# EAGLE board InkTime Schematic WK1 (EAGLE 9.7.0)
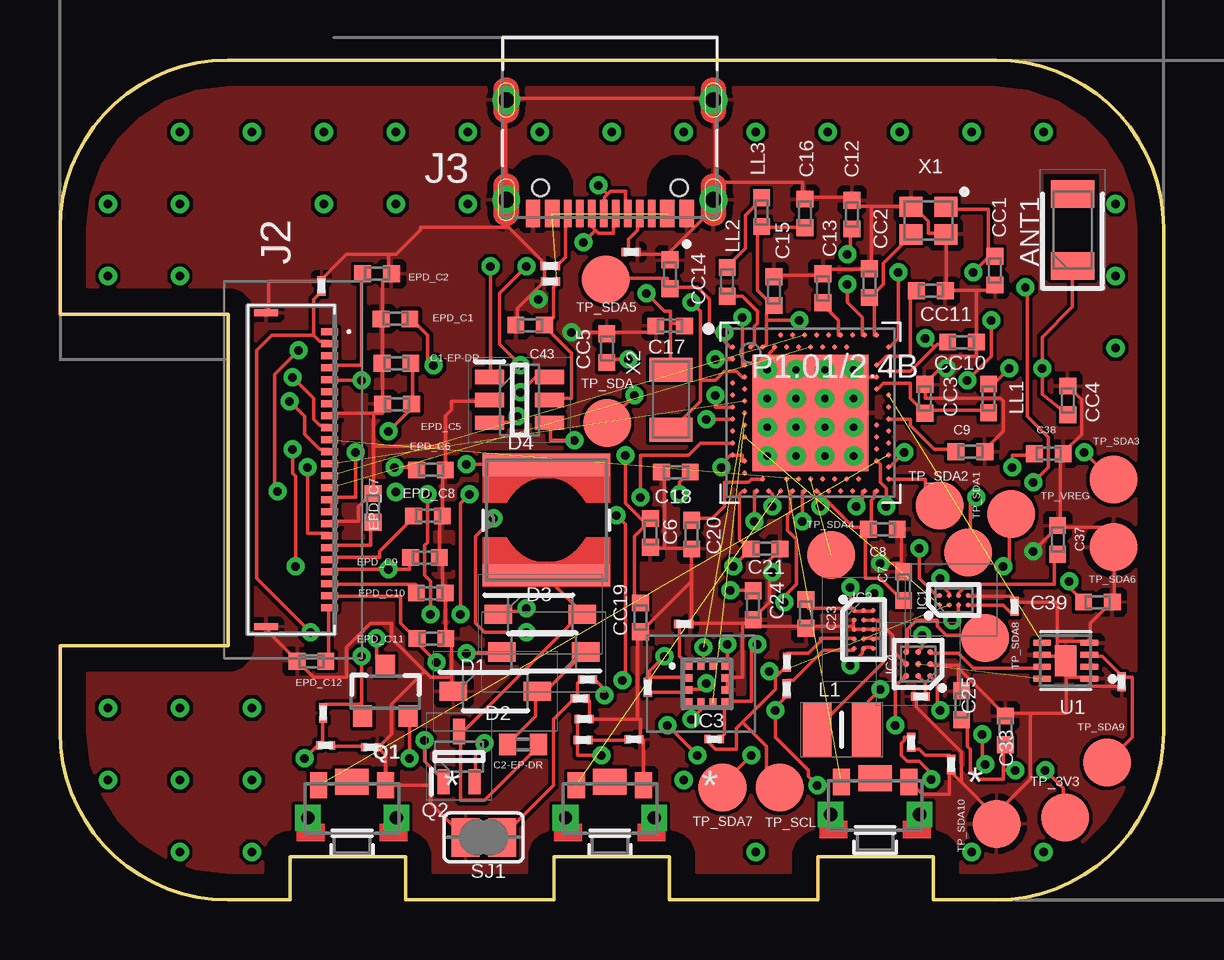
[diagram p0: board, top side]
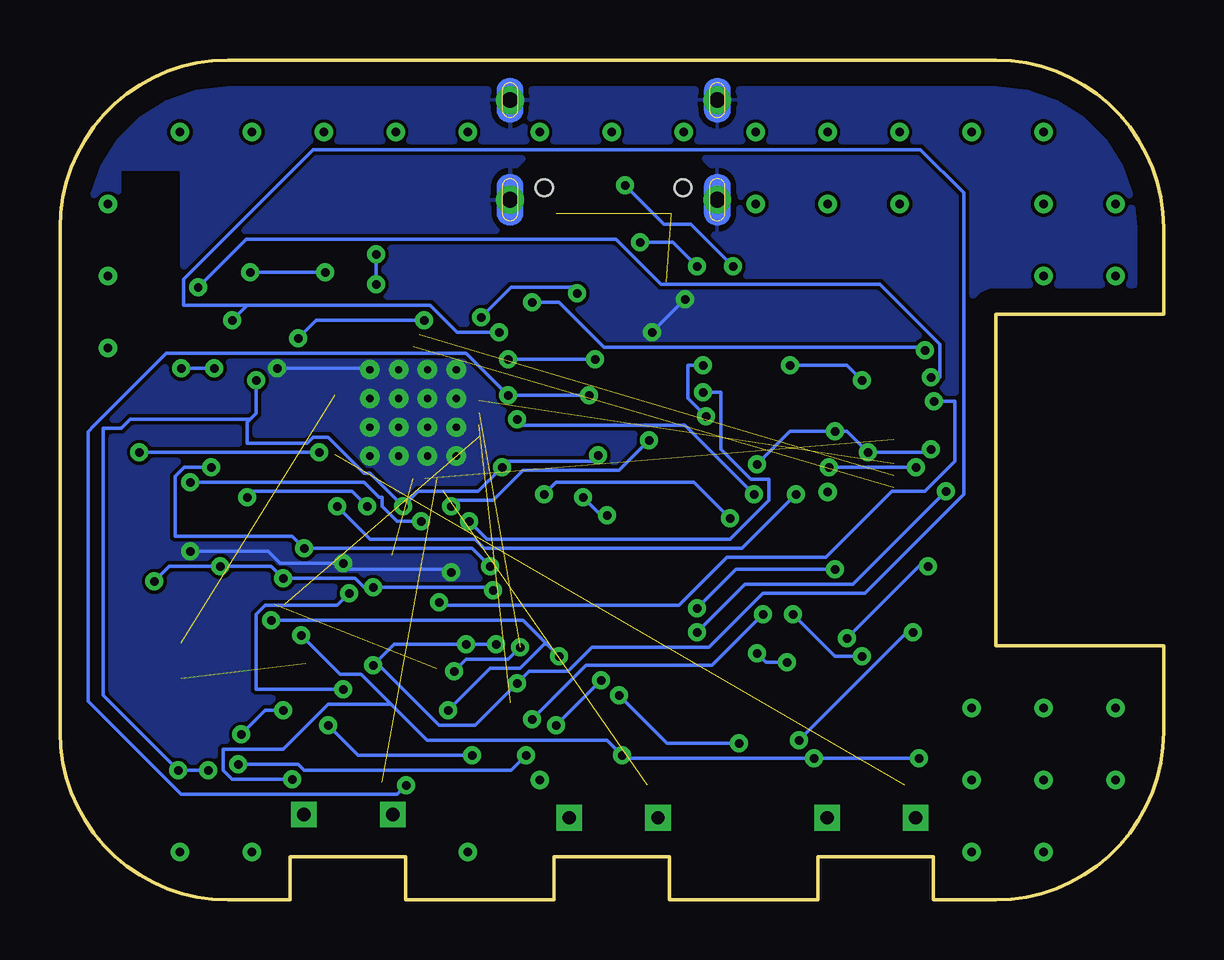
[diagram p1: board, bottom side, seen from below]

Size 46 x 35 mm. Coordinates in mm from the lower left corner, seen from the top.
Outline: 39,0 36.4,0 36.4,1.8 31.6,1.8 31.6,0 25.4,0 25.4,1.8 20.6,1.8 20.6,0 14.4,0 14.4,1.8 9.6,1.8 9.6,0 7,0 arc-90 0,7 0,10.6 7,10.6 7,24.4 0,24.4 0,28 arc-90 7,35 39,35 arc-90 46,28 46,7 arc-90 39,0
Copper layers (1*16): Top / Bottom
Stack-up Default Layer Stack: Top SilkScreen Epoxy Ink / Top SolderMask SR:Green 0.0254mm Dk 4.3 / Top Surface Finish Lead-Free 0.02mm / Top CuFoil:007 0.035mm / Dielectric-1 User Defined 1.5mm / Bottom CuFoil:007 0.035mm / Bottom Surface Finish Lead-Free 0.02mm / Bottom SolderMask SR:Green 0.0254mm Dk 4.3 / Bottom SilkScreen Epoxy Ink
Design rules: minimum copper width 6mil, minimum drill size 0.35mm, copper clearance wire_polygon to wire_polygon 6mil, copper clearance wire_polygon to pad_smd 6mil, copper clearance wire_polygon to via 6mil, copper clearance pad_smd to pad_smd 6mil, copper clearance pad_smd to via 6mil, copper clearance via to via 6mil, copper clearance smd to pad (same net) 6mil, copper clearance smd to via (same net) 6mil, copper clearance smd to smd (same net) 6mil, dimension clearance 40mil, via restrict clearance 0mil, restrict clearance 0mil, drill distance 6mil, keepout clearance 0mil
RestrictTop: area 41,25.8 to 43.3,30.3
RestrictBottom: area 41,25.8 to 43.4,30.4

## Footprints (pad centres in the part's own frame; a part is rotated, then mirrored left to right if it is on the bottom)
2450AT18B100E_ANTC3216X140N = smd 1.15 x 1.8: 1 -1.5,0; 2 1.5,0
NORDIC_NRF_3_RESC0402_M = smd 0.7 x 0.7: 1 -0.6,0; 2 0.6,0
GRM011R60J152KE01L_1_0201 = smd 0.35 x 0.25: 1 0,0.275; 2 0,-0.275
ESP32_C6_LIBRARY_1_ESP32_WROVER_EAGLE-LTSPICE_C0402 = smd 0.7 x 0.9: 1 -0.65,0; 2 0.65,0
ESP32_C6_LIBRARY_5_SOD3716X135N = smd 1.15 x 0.8: 1 -1.75,0; 2 1.75,0
ESP32_C6_LIBRARY_3_SOT95P280X145-6N = smd 1.2 x 0.6: 1 -1.25,0.95; 2 -1.25,0; 3 -1.25,-0.95; 4 1.25,-0.95; 5 1.25,0; 6 1.25,0.95
BQ25180YBGR_BGA8C40P2X4_100X155X50 = smd 0.2 x 0.2: A1 -0.2,0.6; A2 0.2,0.6; B1 -0.2,0.2; B2 0.2,0.2; C1 -0.2,-0.2; C2 0.2,-0.2; D1 -0.2,-0.6; D2 0.2,-0.6
RT6160AWSC_BGA15C40P3X5_140X230X60 = smd 0.216 x 0.216: A1 -0.4,0.8; A2 0,0.8; A3 0.4,0.8; B1 -0.4,0.4; B2 0,0.4; B3 0.4,0.4; C1 -0.4,0; C2 0,0; C3 0.4,0; D1 -0.4,-0.4; D2 0,-0.4; D3 0.4,-0.4; E1 -0.4,-0.8; E2 0,-0.8; E3 0.4,-0.8
BMA423_BMA423 = smd 0.3 x 0.35: 1 -0.75,-0.775; 2 -0.25,-0.775; 3 0.25,-0.775; 4 0.75,-0.775; 7 0.75,0.775; 8 0.25,0.775; 9 -0.25,0.775; 10 -0.75,0.775 | smd 0.35 x 0.3: 5 0.775,-0.25; 6 0.775,0.25; 11 -0.775,0.25; 12 -0.775,-0.25
DRV2605YZFR_BGA9C50P3X3_144X144X62 = smd 0.25 x 0.25: A1 -0.5,0.5; A2 0,0.5; A3 0.5,0.5; B1 -0.5,0; B2 0,0; B3 0.5,0; C1 -0.5,-0.5; C2 0,-0.5; C3 0.5,-0.5
503480-2400_5034802400 = smd 0.3 x 0.7: 1 -5.75,1.525; 2 -5.25,1.525; 3 -4.75,1.525; 4 -4.25,1.525; 5 -3.75,1.525; 6 -3.25,1.525; 7 -2.75,1.525; 8 -2.25,1.525; 9 -1.75,1.525; 10 -1.25,1.525; 11 -0.75,1.525; 12 -0.25,1.525; 13 0.25,1.525; 14 0.75,1.525; 15 1.25,1.525; 16 1.75,1.525; 17 2.25,1.525; 18 2.75,1.525; 19 3.25,1.525; 20 3.75,1.525; 21 4.25,1.525; 22 4.75,1.525; 23 5.25,1.525; 24 5.75,1.525 | smd 0.3 x 1: MP1 -6.54,-1.125; MP2 6.54,-1.125
KH-TYPE-C-16P_KINGHELM_KH-TYPE-C-16P = smd 0.6 x 1.15: A1_B12 -3.2,4.725; A4_B9 -2.4,4.725; A9_B4 2.4,4.725; A12_B1 3.2,4.725 | smd 0.3 x 1.15: A5 -1.25,4.725; A6 -0.25,4.725; A7 0.25,4.725; A8 1.25,4.725; B5 1.75,4.725; B6 0.75,4.725; B7 -0.75,4.725; B8 -1.75,4.725 | drill 0.65 pad 1.05: SH1 -4.32,0; SH2 4.32,0; SH3 -4.32,4.15; SH4 4.32,4.15 | hole 0.7: -2.89,3.65; 2.89,3.65
MLP2016SR47MT0S1_INDC2016X100N = smd 1.2 x 2.2: 1 -1.028,0; 2 1.028,0
ESP32_C6_LIBRARY_2_IND_4828-WE-TPC_WRE = smd 0.9 x 5.3: 1 -2.286,0; 2 2.286,0
NORDIC_NRF_2_RESC0402_M = smd 0.7 x 0.7: 1 -0.6,0; 2 0.6,0
NORDIC_NRF_4_AQFN50P700X700X85_HS-74N = smd 4.85 x 4.85: P$74 0,0 | drill 0.3 pad 0.6: P$75 -1.8,1.8; P$76 -0.6,1.8; P$77 0.6,1.8; P$78 1.8,1.8; P$79 -1.8,0.6; P$80 -0.6,0.6; P$81 0.6,0.6; P$82 1.8,0.6; P$83 -1.8,-0.6; P$84 -0.6,-0.6; P$85 0.6,-0.6; P$86 1.8,-0.6; P$87 -1.8,-1.8; P$88 -0.6,-1.8; P$89 0.6,-1.8; P$90 1.8,-1.8 | smd 0.2 x 0.2: P$A8 -1.25,3.25; P$A10 -0.75,3.25; P$A12 -0.25,3.25; P$A14 0.25,3.25; P$A16 0.75,3.25; P$A18 1.25,3.25; P$A20 1.75,3.25; P$A22 2.25,3.25; P$A23 2.75,3.25; P$AA24 3.25,-2.25; P$AB2 -2.75,-2.5; P$AC5 -2,-2.75; P$AC9 -1,-2.75; P$AC11 -0.5,-2.75; P$AC13 0,-2.75; P$AC15 0.5,-2.75; P$AC17 1,-2.75; P$AC19 1.5,-2.75; P$AC21 2,-2.75; P$AC24 3.25,-2.75; P$AD2 -2.75,-3.25; P$AD4 -2.25,-3.25; P$AD6 -1.75,-3.25; P$AD8 -1.25,-3.25; P$AD10 -0.75,-3.25; P$AD12 -0.25,-3.25; P$AD14 0.25,-3.25; P$AD16 0.75,-3.25; P$AD18 1.25,-3.25; P$AD20 1.75,-3.25; P$AD22 2.25,-3.25; P$AD23 2.75,-3.25; P$B1 -3.25,2.75; P$B3 -2.5,2.75; P$B5 -2,2.75; P$B7 -1.5,2.75; P$B9 -1,2.75; P$B11 -0.5,2.75; P$B13 0,2.75; P$B15 0.5,2.75; P$B17 1,2.75; P$B19 1.5,2.75; P$B24 3.25,2.75; P$C1 -3.25,2.25; P$D2 -2.75,2; P$D23 2.75,2; P$E24 3.25,1.75; P$F2 -2.75,1.5; P$F23 2.75,1.5; P$G1 -3.25,1.25; P$H2 -2.75,1; P$H23 2.75,1; P$J1 -3.25,0.75; P$J24 3.25,0.75; P$K2 -2.75,0.5; P$L1 -3.25,0.25; P$L24 3.25,0.25; P$M2 -2.75,0; P$N1 -3.25,-0.25; P$N24 3.25,-0.25; P$P2 -2.75,-0.5; P$P23 2.75,-0.5; P$R1 -3.25,-0.75; P$R24 3.25,-0.75; P$T2 -2.75,-1; P$T23 2.75,-1; P$U1 -3.25,-1.25; P$U24 3.25,-1.25; P$V23 2.75,-1.5; P$W1 -3.25,-1.75; P$W24 3.25,-1.75; P$Y2 -2.75,-2; P$Y23 2.75,-2
ESP32_C6_LIBRARY_4_ESP32_C6_LIBRARY_4_ESP32_C6_LIBRARY_4_ESP32_C6_LIBRARY_4_ESP32_WROVER_SPARKFUN-DISCRETESEMI_SOT23-3 = smd 0.8 x 0.9: 1 -0.95,-1; 2 0.95,-1; 3 0,1.1
ESP32_C6_LIBRARY_6_SOT65P210X110-3N = smd 1.05 x 0.5: 1 -1.05,0.65; 2 -1.05,-0.65; 3 1.05,0
CPF0201D7K68C1_0201 = smd 0.35 x 0.25: 1 0,0.275; 2 0,-0.275
ESP32_C6_LIBRARY_7_JUMPER_SJ = smd 1.168 x 1.6: 1 -0.762,0; 2 0.762,0
2025-10-22_07-23-44_LIBRARY_SW_EVP-AKE31A_PAN = smd 0.711 x 1.092: 1 -1.4,-0.972; 2 1.4,-0.972 | drill 0.559 pad 0.914 square: 3 -1.848,0.381; 4 1.848,0.381 | smd 1.397 x 1.092: 5 0,-1.124
HECTOR_WATCH_1_TP20R = smd 2 x 2: TP 0,0
ESP32_C6_LIBRARY_SON50P200X200X80-9N = smd 0.76 x 0.27: 1 -0.985,0.75; 2 -0.985,0.25; 3 -0.985,-0.25; 4 -0.985,-0.75; 5 0.985,-0.75; 6 0.985,-0.25; 7 0.985,0.25; 8 0.985,0.75 | smd 0.9 x 1.3: 9 0,0
NORDIC_NRF_BT-XTAL_2016_N = smd 0.95 x 0.85: 1 -0.725,-0.575; 2 0.725,-0.575; 3 0.725,0.575; 4 -0.725,0.575
NORDIC_NRF_1_XTAL_3215_N = smd 1 x 1.8: 1 -1.25,0; 2 1.25,0

## Placement (x,y rotation side)
ANT1  2450AT18B100E_2450AT18B100E  [2450AT18B100E_ANTC3216X140N]  42.21,27.92 90 top
C1-EP-DR  10uF  [NORDIC_NRF_3_RESC0402_M]  14.03,22.36 180 top
C2  GRM011R60J152KE01L_1_GRM011R60J152KE01L  [GRM011R60J152KE01L_1_0201]  44.24,9.09 180 top
C2-EP-DR  4.7uF/25V  [ESP32_C6_LIBRARY_1_ESP32_WROVER_EAGLE-LTSPICE_C0402]  19.3,6.48 0 top
C3  1uF  [GRM011R60J152KE01L_1_0201]  35.87,8.48 90 top
C4  0.1uF  [GRM011R60J152KE01L_1_0201]  21.85,7.54 270 top
C5  GRM011R60J152KE01L_1_GRM011R60J152KE01L  [GRM011R60J152KE01L_1_0201]  12.96,6.36 270 top
C6  4.7uF  [NORDIC_NRF_3_RESC0402_M]  24.61,15.29 90 top
C7  100nF  [NORDIC_NRF_3_RESC0402_M]  35.17,13.08 90 top
C8  100nF  [NORDIC_NRF_3_RESC0402_M]  34.3,15.45 0 top
C9  820pF  [NORDIC_NRF_3_RESC0402_M]  37.95,18.68 0 top
C10  GRM011R60J152KE01L_1_GRM011R60J152KE01L  [GRM011R60J152KE01L_1_0201]  23.92,6.69 270 top
C11  GRM011R60J152KE01L_1_GRM011R60J152KE01L  [GRM011R60J152KE01L_1_0201]  37.15,5.64 180 top
C12  100pF  [NORDIC_NRF_3_RESC0402_M]  33.01,28.56 90 top
C13  N.C  [NORDIC_NRF_3_RESC0402_M]  31.8,25.49 90 top
C15  1uF  [NORDIC_NRF_3_RESC0402_M]  29.76,25.37 90 top
C16  47nF  [NORDIC_NRF_3_RESC0402_M]  31.05,28.61 90 top
C17  12pF  [NORDIC_NRF_3_RESC0402_M]  25.44,23.92 180 top
C18  12pF  [NORDIC_NRF_3_RESC0402_M]  25.67,17.83 180 top
C20  4.7uF  [NORDIC_NRF_3_RESC0402_M]  26.33,15.22 90 top
C21  4.7uF  [NORDIC_NRF_3_RESC0402_M]  29.41,14.63 0 top
C23  0.1uF  [NORDIC_NRF_3_RESC0402_M]  31.09,11.92 90 top
C24  10uF  [NORDIC_NRF_3_RESC0402_M]  28.89,12.28 90 top
C25  22uF  [NORDIC_NRF_3_RESC0402_M]  37.58,8.11 90 top
C33  22uF  [NORDIC_NRF_3_RESC0402_M]  39.4,7.07 90 top
C37  1uF  [NORDIC_NRF_3_RESC0402_M]  41.58,15 90 top
C38  1uF  [NORDIC_NRF_3_RESC0402_M]  41.21,18.59 0 top
C39  10uF  [NORDIC_NRF_3_RESC0402_M]  43.26,12.41 0 top
C42  GRM011R60J152KE01L_1_GRM011R60J152KE01L  [GRM011R60J152KE01L_1_0201]  20.45,25.77 90 top
C43  4.7uF  [NORDIC_NRF_3_RESC0402_M]  19.6,23.96 180 top
CC1  12pF  [NORDIC_NRF_3_RESC0402_M]  38.97,26.23 270 top
CC2  12pF  [NORDIC_NRF_3_RESC0402_M]  33.74,25.7 90 top
CC3  1pF  [NORDIC_NRF_3_RESC0402_M]  36.05,20.89 270 top
CC4  1pF  [NORDIC_NRF_3_RESC0402_M]  42.01,20.82 270 top
CC5  100nF  [NORDIC_NRF_3_RESC0402_M]  22.8,23 270 top
CC10  N.C  [NORDIC_NRF_3_RESC0402_M]  37.6,23.25 0 top
CC11  100pF  [NORDIC_NRF_3_RESC0402_M]  36.3,25.38 0 top
CC14  4.7uF  [NORDIC_NRF_3_RESC0402_M]  25.43,26.07 270 top
CC19  100nF  [NORDIC_NRF_3_RESC0402_M]  24.2,11.78 270 top
D1  ESP32_C6_LIBRARY_5_MBR0530  [ESP32_C6_LIBRARY_5_SOD3716X135N]  20.17,10.33 180 top
D2  ESP32_C6_LIBRARY_5_MBR0530  [ESP32_C6_LIBRARY_5_SOD3716X135N]  18.15,8.69 0 top
D3  ESP32_C6_LIBRARY_5_MBR0530  [ESP32_C6_LIBRARY_5_SOD3716X135N]  20.03,11.9 0 top
D4  ESP32_C6_LIBRARY_3_USBLC6-2SC6Y  [ESP32_C6_LIBRARY_3_SOT95P280X145-6N]  19.16,20.83 0 top
EPD_C1  1uF/50V  [NORDIC_NRF_3_RESC0402_M]  13.99,24.21 0 top
EPD_C2  1uF/50V  [NORDIC_NRF_3_RESC0402_M]  13.22,26.09 180 top
EPD_C5  0.1uF/50V  [NORDIC_NRF_3_RESC0402_M]  14.05,20.66 0 top
EPD_C6  1uF/50V  [NORDIC_NRF_3_RESC0402_M]  15.46,17.92 180 top
EPD_C7  1uF/50V  [NORDIC_NRF_3_RESC0402_M]  13.05,16.34 270 top
EPD_C8  1uF/50V  [NORDIC_NRF_3_RESC0402_M]  15.34,16 180 top
EPD_C9  1uF/50V  [NORDIC_NRF_3_RESC0402_M]  15.21,14.27 180 top
EPD_C10  1uF/50V  [NORDIC_NRF_3_RESC0402_M]  15.46,12.79 180 top
EPD_C11  1uF/50V  [NORDIC_NRF_3_RESC0402_M]  15.48,10.89 180 top
EPD_C12  1uF/50V  [NORDIC_NRF_3_RESC0402_M]  10.49,9.95 0 top
IC1  BQ25180YBGR_BQ25180YBGR  [BQ25180YBGR_BGA8C40P2X4_100X155X50]  37.26,12.5 90 top
IC2  RT6160AWSC_RT6160AWSC  [RT6160AWSC_BGA15C40P3X5_140X230X60]  33.5,11.27 0 top
IC3  BMA423_BMA423  [BMA423_BMA423]  26.97,9 270 top
IC4  DRV2605YZFR_DRV2605YZFR  [DRV2605YZFR_BGA9C50P3X3_144X144X62]  35.77,9.83 180 top
J2  503480-2400_503480-2400  [503480-2400_5034802400]  9.72,17.93 270 top
J3  KH-TYPE-C-16P_KH-TYPE-C-16P  [KH-TYPE-C-16P_KINGHELM_KH-TYPE-C-16P]  22.92,33.33 180 top
L1  MLP2016SR47MT0S1_FTC252012SR47MBCA  [MLP2016SR47MT0S1_INDC2016X100N]  32.59,7.09 180 top
L2  ESP32_C6_LIBRARY_2_744043680IND_4828-WE-TPC_WRE  [ESP32_C6_LIBRARY_2_IND_4828-WE-TPC_WRE]  20.27,15.83 90 top
LL1  3.9nH  [NORDIC_NRF_2_RESC0402_M]  38.71,20.9 90 top
LL2  10uH  [NORDIC_NRF_2_RESC0402_M]  27.81,25.75 270 top
LL3  15uH  [NORDIC_NRF_2_RESC0402_M]  29.25,28.67 90 top
P1.01/2.4B  NORDIC_NRF_4_NRF52840_QF  [NORDIC_NRF_4_AQFN50P700X700X85_HS-74N]  31.28,20.3 0 top
Q1  20V/4.2A/52mΩ/1.4W  [ESP32_C6_LIBRARY_4_ESP32_C6_LIBRARY_4_ESP32_C6_LIBRARY_4_ESP32_C6_LIBRARY_4_ESP32_WROVER_SPARKFUN-DISCRETESEMI_SOT23-3]  13.57,8.66 0 top
Q2  ESP32_C6_LIBRARY_6_SI1308EDL-T1-GE3  [ESP32_C6_LIBRARY_6_SOT65P210X110-3N]  16.64,5.97 90 top
R1  10K  [CPF0201D7K68C1_0201]  39.8,12.24 0 top
R2  CPF0201D7K68C1_CPF0201D7K68C1  [CPF0201D7K68C1_0201]  30.3,9.91 180 top
R3  CPF0201D7K68C1_CPF0201D7K68C1  [CPF0201D7K68C1_0201]  30.29,8.8 180 top
R4  CPF0201D7K68C1_CPF0201D7K68C1  [CPF0201D7K68C1_0201]  27.27,6.7 90 top
R5  CPF0201D7K68C1_CPF0201D7K68C1  [CPF0201D7K68C1_0201]  24.5,8.86 0 top
R6  CPF0201D7K68C1_CPF0201D7K68C1  [CPF0201D7K68C1_0201]  10.89,25.58 0 top
R7  CPF0201D7K68C1_CPF0201D7K68C1  [CPF0201D7K68C1_0201]  10.97,7.79 0 top
R8  CPF0201D7K68C1_CPF0201D7K68C1  [CPF0201D7K68C1_0201]  26,11.5 90 top
R9  CPF0201D7K68C1_CPF0201D7K68C1  [CPF0201D7K68C1_0201]  21.99,9.18 90 top
R10  CPF0201D7K68C1_CPF0201D7K68C1  [CPF0201D7K68C1_0201]  21.68,8.4 270 top
R11  CPF0201D7K68C1_CPF0201D7K68C1  [CPF0201D7K68C1_0201]  11.07,6.45 270 top
R12  CPF0201D7K68C1_CPF0201D7K68C1  [CPF0201D7K68C1_0201]  21.81,6.67 270 top
R13  CPF0201D7K68C1_CPF0201D7K68C1  [CPF0201D7K68C1_0201]  35.47,6.57 180 top
R14  CPF0201D7K68C1_CPF0201D7K68C1  [CPF0201D7K68C1_0201]  23.8,27.01 90 top
R15  CPF0201D7K68C1_CPF0201D7K68C1  [CPF0201D7K68C1_0201]  20.44,26.41 90 top
SJ1  0  [ESP32_C6_LIBRARY_7_JUMPER_SJ]  17.66,2.61 0 top
SW1  2025-10-22_07-23-44_LIBRARY_EVP-AKE31ASW_EVP-AKE31A_PAN  [2025-10-22_07-23-44_LIBRARY_SW_EVP-AKE31A_PAN]  22.92,3.81 180 top
SW2  2025-10-22_07-23-44_LIBRARY_EVP-AKE31ASW_EVP-AKE31A_PAN  [2025-10-22_07-23-44_LIBRARY_SW_EVP-AKE31A_PAN]  33.98,3.94 180 top
SW3  2025-10-22_07-23-44_LIBRARY_EVP-AKE31ASW_EVP-AKE31A_PAN  [2025-10-22_07-23-44_LIBRARY_SW_EVP-AKE31A_PAN]  12.17,3.81 180 top
TP_3V3  HECTOR_WATCH_1_TPTP20R  [HECTOR_WATCH_1_TP20R]  41.89,3.43 0 top
TP_SCL  HECTOR_WATCH_1_TPTP20R  [HECTOR_WATCH_1_TP20R]  30.01,4.69 0 top
TP_SDA  HECTOR_WATCH_1_TPTP20R  [HECTOR_WATCH_1_TP20R]  22.8,19.87 0 top
TP_SDA1  HECTOR_WATCH_1_TPTP20R  [HECTOR_WATCH_1_TP20R]  37.86,14.48 0 top
TP_SDA2  HECTOR_WATCH_1_TPTP20R  [HECTOR_WATCH_1_TP20R]  36.67,16.44 0 top
TP_SDA3  HECTOR_WATCH_1_TPTP20R  [HECTOR_WATCH_1_TP20R]  43.91,17.52 0 top
TP_SDA4  HECTOR_WATCH_1_TPTP20R  [HECTOR_WATCH_1_TP20R]  32.15,14.37 0 top
TP_SDA5  HECTOR_WATCH_1_TPTP20R  [HECTOR_WATCH_1_TP20R]  22.74,25.86 0 top
TP_SDA6  HECTOR_WATCH_1_TPTP20R  [HECTOR_WATCH_1_TP20R]  43.91,14.7 0 top
TP_SDA7  HECTOR_WATCH_1_TPTP20R  [HECTOR_WATCH_1_TP20R]  27.62,4.68 0 top
TP_SDA8  HECTOR_WATCH_1_TPTP20R  [HECTOR_WATCH_1_TP20R]  38.55,10.92 0 top
TP_SDA9  HECTOR_WATCH_1_TPTP20R  [HECTOR_WATCH_1_TP20R]  43.64,5.73 0 top
TP_SDA10  HECTOR_WATCH_1_TPTP20R  [HECTOR_WATCH_1_TP20R]  39.05,3.17 0 top
TP_VREG  HECTOR_WATCH_1_TPTP20R  [HECTOR_WATCH_1_TP20R]  39.65,16.09 0 top
U1  ESP32_C6_LIBRARY_MAX17048G+T10  [ESP32_C6_LIBRARY_SON50P200X200X80-9N]  41.92,9.97 180 top
X1  32MHz  [NORDIC_NRF_BT-XTAL_2016_N]  36.2,28.31 180 top
X2  32.768KHz  [NORDIC_NRF_1_XTAL_3215_N]  25.46,20.85 90 top

## Library data of the parts
ANT1 = InkTime_v5; ARROW_PART_NUMBER: 2450AT18B100E; ARROW_PRICE-STOCK: https://www.arrow.com/en/products/2450at18b100e/johanson-dielectrics?utm_currency=USD&region=nac; DESCRIPTION: Antennas 2.45GHz ANTENNA; HEIGHT: 1.4mm; MANUFACTURER_NAME: JOHANSON TECHNOLOGY; MANUFACTURER_PART_NUMBER: 2450AT18B100E; MOUSER_PART_NUMBER: 609-2450AT18B100E; MOUSER_PRICE-STOCK: https://www.mouser.co.uk/ProductDetail/Johanson-Technology/2450AT18B100E?qs=yCnrNFeXz%252Bh5MFsFIXGZGA%3D%3D
C1-EP-DR C2-C13 C15-C18 C20 C21 C23-C25 C33 C37-C39 C42 C43 CC1-CC5 CC10 CC11 CC14 CC19 EPD_C1 EPD_C2 EPD_C5-EPD_C12 LL1-LL3 R1-R15 SJ1 TP_3V3 TP_SCL TP_SDA TP_SDA1-TP_SDA10 TP_VREG X1 X2 = InkTime_v5
C2-EP-DR = InkTime_v5; SPICEMODEL: NONE; SPICEPREFIX: C
D1-D3 = InkTime_v5; AVAILABILITY: In Stock; CHECK_PRICES: https://www.snapeda.com/parts/MBR0530/Onsemi/view-part/?ref=eda; DESCRIPTION: Diode Schottky 30 V 500mA Surface Mount SOD-123; MF: ON Semiconductor; MP: MBR0530; PACKAGE: SOD-123-2 ON Semiconductor; PRICE: None; PURCHASE-URL: https://www.snapeda.com/api/url_track_click_mouser/?unipart_id=179458&manufacturer=ON Semiconductor&part_name=MBR0530&search_term=None; SNAPEDA_LINK: https://www.snapeda.com/parts/MBR0530/Onsemi/view-part/?ref=snap
D4 = InkTime_v5; AVAILABILITY: In Stock; CHECK_PRICES: https://www.snapeda.com/parts/USBLC6-2SC6Y/STMicroelectronics/view-part/?ref=eda; DESCRIPTION: 17V Clamp 5A (8/20µs) Ipp Tvs Diode Surface Mount SOT-23-6; MF: STMicroelectronics; MP: USBLC6-2SC6Y; PACKAGE: SOT-23-6 STMicroelectronics; PRICE: None; SNAPEDA_LINK: https://www.snapeda.com/parts/USBLC6-2SC6Y/STMicroelectronics/view-part/?ref=snap
IC1 = InkTime_v5; ARROW_PART_NUMBER: BQ25180YBGR; ARROW_PRICE-STOCK: https://www.arrow.com/en/products/bq25180ybgr/texas-instruments?utm_currency=USD&region=nac; DESCRIPTION: Charger IC Lithium Ion/Polymer, Lithium Iron Phosphate 8-DSBGA (1.6x1.1); HEIGHT: 0.5mm; MANUFACTURER_NAME: Texas Instruments; MANUFACTURER_PART_NUMBER: BQ25180YBGR; MOUSER_PART_NUMBER: 595-BQ25180YBGR; MOUSER_PRICE-STOCK: https://www.mouser.co.uk/ProductDetail/Texas-Instruments/BQ25180YBGR?qs=doiCPypUmgEWjAK%252BJAX6Tw%3D%3D
IC2 = InkTime_v5; DESCRIPTION: Buck-Boost Regulator Positive Output Step-Up/Step-Down I2C DC-DC Controller IC 15-WL-CSP (BSC) (1.4x2.3); HEIGHT: 0.6mm; MANUFACTURER_NAME: RICHTEK; MANUFACTURER_PART_NUMBER: RT6160AWSC; MOUSER_PART_NUMBER: 835-RT6160AWSC; MOUSER_PRICE-STOCK: https://www.mouser.co.uk/ProductDetail/Richtek/RT6160AWSC?qs=amGC7iS6iy%2FLd9PSoixZXQ%3D%3D
IC3 = InkTime_v5; ARROW_PART_NUMBER: BMA423; ARROW_PRICE-STOCK: https://www.arrow.com/en/products/bma423/bosch; DESCRIPTION: Accelerometers Triaxial low-g 12bit Acceleration Sensor; HEIGHT: 1mm; MANUFACTURER_NAME: BOSCH; MANUFACTURER_PART_NUMBER: BMA423; MOUSER_PART_NUMBER: 262-BMA423; MOUSER_PRICE-STOCK: https://www.mouser.co.uk/ProductDetail/Bosch-Sensortec/BMA423?qs=HXFqYaX1Q2xC%252BSgeGoX3mg%3D%3D
IC4 = InkTime_v5; ARROW_PART_NUMBER: DRV2605YZFR; ARROW_PRICE-STOCK: https://www.arrow.com/en/products/drv2605yzfr/texas-instruments?region=nac; DESCRIPTION: Haptic Driver for ERM/LRA with Built-In Library and Smart Loop Architecture; HEIGHT: 0.625mm; MANUFACTURER_NAME: Texas Instruments; MANUFACTURER_PART_NUMBER: DRV2605YZFR
J2 = InkTime_v5; DESCRIPTION: FFC & FPC Connectors 0.5mm FPC RA SMT Dual Contact 24Ckt; HEIGHT: 1.87mm; MANUFACTURER_NAME: Molex; MANUFACTURER_PART_NUMBER: 503480-2400; MOUSER_PART_NUMBER: 538-503480-2400; MOUSER_PRICE-STOCK: https://www.mouser.co.uk/ProductDetail/Molex/503480-2400?qs=OAhjpuo3Vu7efIoxFh9AOw%3D%3D
J3 = InkTime_v5; AVAILABILITY: Not in stock; CHECK_PRICES: https://www.snapeda.com/parts/KH-TYPE-C-16P/Kinghelm/view-part/?ref=eda; MF: kinghelm; MP: KH-TYPE-C-16P; PACKAGE: None; PRICE: None; SNAPEDA_LINK: https://www.snapeda.com/parts/KH-TYPE-C-16P/Kinghelm/view-part/?ref=snap
L1 = InkTime_v5; DESCRIPTION: SMD / SMT Inductors (Coils), L=0.47?H, L x W x T :; HEIGHT: 1mm; JLCPCB: https://jlcpcb.com/partdetail/6763488-FTC252012SR47MBCA/C5832368; MANUFACTURER_NAME: TDK; MANUFACTURER_PART_NUMBER: FTC252012SR47MBCA
L2 = InkTime_v5; COPYRIGHT: Copyright (C) 2024 Ultra Librarian. All rights reserved.; MANUFACTURER_PART_NUMBER: 744043680; MFR_NAME: Wurth Electronics
P1.01/2.4B = InkTime_v5; BGA: (LAYERS (-1 3V3/2.4A))
Q1 = InkTime_v5; PROD_ID: TRAN-14388
Q2 = InkTime_v5; AVAILABILITY: In Stock; CHECK_PRICES: https://www.snapeda.com/parts/SI1308EDL-T1-GE3/Vishay+Siliconix/view-part/?ref=eda; DESCRIPTION: Si1308EDL-T1-GE3 N-channel MOSFET Transistor, 1.5 A, 30 V, 3-Pin SC-70 | Siliconix / Vishay SI1308EDL-T1-GE3; MF: Vishay Siliconix; MP: SI1308EDL-T1-GE3; PACKAGE: SOT-323 Vishay Semiconductor; PRICE: None; PURCHASE-URL: https://www.snapeda.com/api/url_track_click_mouser/?unipart_id=274603&manufacturer=Vishay Siliconix&part_name=SI1308EDL-T1-GE3&search_term=None; SNAPEDA_LINK: https://www.snapeda.com/parts/SI1308EDL-T1-GE3/Vishay+Siliconix/view-part/?ref=snap
SW1-SW3 = InkTime_v5; COPYRIGHT: Copyright (C) 2025 Ultra Librarian. All rights reserved.; DIGI-KEY_PART_NUMBER_1: P123437TR-ND; DIGI-KEY_PART_NUMBER_2: P123437CT-ND; DIGI-KEY_PART_NUMBER_3: P123437DKR-ND; MANUFACTURER_NAME: Panasonic; MANUFACTURER_PART_NUMBER: EVP-AKE31A
U1 = InkTime_v5; AVAILABILITY: In Stock; CHECK_PRICES: https://www.snapeda.com/parts/MAX17048G+T10/Analog+Devices/view-part/?ref=eda; DESCRIPTION: 3µA 1-Cell/2-Cell Fuel Gauge with ModelGauge; MF: Analog Devices; MP: MAX17048G+T10; PACKAGE: TDFN-8 Maxim; PRICE: None; PURCHASE-URL: https://www.snapeda.com/api/url_track_click_mouser/?unipart_id=329239&manufacturer=Analog Devices&part_name=MAX17048G+T10&search_term=None; SNAPEDA_LINK: https://www.snapeda.com/parts/MAX17048G+T10/Analog+Devices/view-part/?ref=snap

## Nets
3V3/1.7D: C4.2 IC4.C2 Q1.2 R7.2 R11.2 R12.2 R13.2
3V3/2.4A: C6.2 C7.1 C8.1 C25.1 C33.1 CC14.2 CC19.1 IC2.E2 IC2.E3 IC3.3 IC3.7 IC3.10 P1.01/2.4B.P$AD14 P1.01/2.4B.P$AD23 P1.01/2.4B.P$B1 P1.01/2.4B.P$W1 P1.01/2.4B.P$Y2 R4.2 R5.2 TP_3V3.TP TP_SDA5.TP
ALERT: P1.01/2.4B.P$J24 U1.5
D+: D4.4 P1.01/2.4B.P$AD6
D-: D4.6 P1.01/2.4B.P$AD4
DN: D4.1 J3.A7 J3.B7
DP: D4.3 J3.A6 J3.B6
EPD_3V3: C1-EP-DR.1 EPD_C5.2 J2.15 J2.16 L2.2 Q1.3
EPD_BUSY: J2.9 P1.01/2.4B.P$AD12
EPD_CS: J2.12 P1.01/2.4B.P$K2
EPD_DC: J2.11 P1.01/2.4B.P$AD10
EPD_RST: J2.10 P1.01/2.4B.P$AC11
GDR: J2.2 Q2.1 R6.2
GND: C1-EP-DR.2 C2.1 C3.1 C4.1 C5.1 C6.1 C7.2 C8.2 C9.2 C10.1 C11.1 C12.2 C13.2 C15.2 C16.2 C17.2 C18.2 C20.1 C21.2 C23.1 C24.1 C25.2 C33.2 C37.2 C38.2 C39.2 C42.1 C43.2 CC1.2 CC2.2 CC3.1 CC4.1 CC5.1 CC10.2 CC11.2 CC14.1 CC19.2 D2.1 D4.2 EPD_C1.1 EPD_C2.1 EPD_C5.1 EPD_C6.1 EPD_C7.1 EPD_C8.1 EPD_C9.1 EPD_C10.1 EPD_C11.1 EPD_C12.1 IC1.D2 IC2.B1 IC2.C1 IC2.C2 IC2.C3 IC3.8 IC3.9 IC4.B1 IC4.B3 J2.8 J2.17 J2.MP1 J2.MP2 J3.A1_B12 J3.A12_B1 J3.SH1 J3.SH2 J3.SH3 J3.SH4 P1.01/2.4B.P$74 P1.01/2.4B.P$75 P1.01/2.4B.P$76 P1.01/2.4B.P$77 P1.01/2.4B.P$78 P1.01/2.4B.P$79 P1.01/2.4B.P$80 P1.01/2.4B.P$81 P1.01/2.4B.P$82 P1.01/2.4B.P$83 P1.01/2.4B.P$84 P1.01/2.4B.P$85 P1.01/2.4B.P$86 P1.01/2.4B.P$87 P1.01/2.4B.P$88 P1.01/2.4B.P$89 P1.01/2.4B.P$90 P1.01/2.4B.P$B7 P1.01/2.4B.P$F23 R1.1 R6.1 R8.2 R10.1 R14.2 R15.1 SJ1.1 SW1.1 SW2.1 SW3.1 TP_SDA6.TP TP_SDA10.TP U1.1 U1.4 U1.6 U1.9 X1.2 X1.4
HAPTIC_EN: IC4.A1 P1.01/2.4B.P$U1
IMU_INT1: IC3.5 P1.01/2.4B.P$N1
IMU_INT2: IC3.6 P1.01/2.4B.P$P2
LX1: IC2.B2 IC2.B3 L1.1
LX2: IC2.D2 IC2.D3 L1.2
MOSI: J2.14 P1.01/2.4B.P$B13
N$1: IC1.D1 R1.2
N$2: C9.1 P1.01/2.4B.P$N24
N$3: CC3.2 LL1.1 P1.01/2.4B.P$H23
N$4: IC2.D1 R2.2
N$5: IC2.E1 R3.2
N$6: C20.2 P1.01/2.4B.P$AC5
N$7: ANT1.1 CC4.2 LL1.2
N$8: CC1.1 P1.01/2.4B.P$B24 X1.1
N$9: CC2.1 P1.01/2.4B.P$A23 X1.3
N$10: CC11.1 P1.01/2.4B.P$D23
N$11: C18.1 P1.01/2.4B.P$F2 X2.1
N$12: C12.1 P1.01/2.4B.P$A22
N$13: C13.1 P1.01/2.4B.P$A18
N$14: LL2.1 LL3.2
N$15: LL2.2 P1.01/2.4B.P$B3
N$17: C15.1 C16.1 CC10.1 LL3.1 P1.01/2.4B.P$B5 P1.01/2.4B.P$E24
N$18: C17.1 P1.01/2.4B.P$D2 X2.2
N$19: IC3.1 R8.1
N$20: CC5.2 P1.01/2.4B.P$C1
N$21: C2-EP-DR.1 D1.1 D2.2
N$22: Q2.2 R9.2
N$23: R9.1 R10.2 SJ1.2
N$24: C2-EP-DR.2 D3.2 L2.1 Q2.3
N$25: EPD_C2.2 J2.4
N$26: EPD_C1.2 J2.5
N$27: J3.B5 R15.2
N$28: EPD_C7.2 J2.19
N$29: C5.2 R11.1
N$30: EPD_C12.2 J2.24
N$31: EPD_C6.2 J2.18
N$32: EPD_C8.2 J2.20
N$33: C10.2 R12.1
N$34: EPD_C10.2 J2.22
N$35: C11.2 R13.1
N$36: J3.A5 R14.1
N$37: C3.2 IC4.A2
OUT+: IC4.A3 TP_SDA7.TP
OUT-: IC4.C3 TP_SDA8.TP
P0.04: P1.01/2.4B.P$J1
P0.09: P1.01/2.4B.P$L24
P0.13: P1.01/2.4B.P$AD8 SW1.2
P0.14: P1.01/2.4B.P$AC9 SW2.2
P0.19: P1.01/2.4B.P$AC15
P0.20: P1.01/2.4B.P$AD16
P0.21: P1.01/2.4B.P$AC17
P0.22: P1.01/2.4B.P$AD18
P0.23: P1.01/2.4B.P$AC19
P0.24: P1.01/2.4B.P$AD20
P0.25: P1.01/2.4B.P$AC21
P0.26: P1.01/2.4B.P$G1
P0.27: P1.01/2.4B.P$H2
P0.28: P1.01/2.4B.P$B11
P0.29: P1.01/2.4B.P$A10
P0.30: P1.01/2.4B.P$B9
P0.31: P1.01/2.4B.P$A8
P1.01: P1.01/2.4B.P$Y23 Q1.1 R7.1
P1.02: P1.01/2.4B.P$W24 SW3.2
P1.03: P1.01/2.4B.P$V23
P1.04: P1.01/2.4B.P$U24
P1.05: P1.01/2.4B.P$T23
P1.06: P1.01/2.4B.P$R24
P1.07: P1.01/2.4B.P$P23
P1.09: P1.01/2.4B.P$R1
P1.10: P1.01/2.4B.P$A20
P1.11: P1.01/2.4B.P$B19
P1.12: P1.01/2.4B.P$B17
P1.13: P1.01/2.4B.P$A16
P1.14: P1.01/2.4B.P$B15
P1.15: P1.01/2.4B.P$A14
PMIC_INT: IC1.A1 P1.01/2.4B.P$T2
PREVGH: D3.1 EPD_C9.2 J2.21
PREVGL: D1.2 EPD_C11.2 J2.23
RESE: J2.3
RESET: P1.01/2.4B.P$AC13 TP_SDA4.TP
SCK: J2.13 P1.01/2.4B.P$A12
SCL/1.4C: IC4.C1 U1.7
SCL/2.4C: IC1.B1 IC3.12 P1.01/2.4B.P$M2 R2.1 R4.1 TP_SCL.TP
SDA/1.4C: IC4.B2 U1.8
SDA/2.4C: IC1.C1 IC3.2 P1.01/2.4B.P$L1 R3.1 R5.1 TP_SDA.TP
SWDCLK: P1.01/2.4B.P$AA24 TP_SDA3.TP
SWDIO: P1.01/2.4B.P$AC24 TP_SDA2.TP
SWO: P1.01/2.4B.P$AD22 TP_SDA1.TP
VBAT/1.2A: C2.2 TP_SDA9.TP U1.2 U1.3
VBAT/2.5C: C37.1 IC1.C2
VBUS/1.5D: C42.2 C43.1 D4.5 J3.A4_B9 J3.A9_B4
VBUS/2.6D: C21.1 C38.1 IC1.A2 P1.01/2.4B.P$AD2
VREG: C23.2 C24.2 C39.1 IC1.B2 IC2.A1 IC2.A2 IC2.A3 TP_VREG.TP

## Tracks (layer width: path | path; a pad name or v marks a point on that pad's centre or on a via)
3V3/1.7D  (via drill 0.35)
  Top 0.152: R7.2 10.95,7.4 10.95,6.65 10.82,6.52 R11.2 10.7,6.4 v10.2,5.9 | v35.95,11.02 35.95,10.52 35.82,10.4 IC4.C2 | v22.57,6.02 21.57,6.02 21.57,6.65 R12.2 21.57,6.77 21.57,7.52 C4.2 | v36.32,5.02 36.32,5.27 35.82,5.77 35.32,5.77 35.07,6.02 35.07,6.52 35.2,6.65 35.2,6.77 35.45,6.77 R13.2 | v14.57,5.9 14.57,7.65 Q1.2
  Bottom 0.152: v35.95,11.02 34.32,9.4 33.45,9.4 32.2,8.15 | 32.2,8.15 30.7,6.65 23.2,6.65 v22.57,6.02 22.45,5.9 v14.57,5.9 v10.2,5.9 | v36.32,5.02 38.82,5.02 39.2,5.4 39.2,6.27 36.7,6.27 34.82,8.15 32.2,8.15
3V3/2.4A  (via drill 0.35)
  Top 0.152: R5.2 24.57,8.65 26.2,8.65 IC3.3 26.32,8.77 26.95,8.77 v26.95,9.02 | R4.2 27.57,6.77 27.7,6.9 27.7,8.15 IC3.7 27.82,8.27 28.82,8.27 28.82,10.4 v29.07,10.65 | IC2.E3 33.82,10.52 33.57,10.52 IC2.E2 33.45,10.4 33.45,10.27 v32.95,9.77 | v27.82,10.65 27.82,9.77 IC3.10 | 39.32,5.4 39.32,6.4 C33.1 | 39.32,5.4 39.32,5.02 38.32,5.02 37.95,5.4 37.95,6.27 37.82,6.4 37.82,7.27 37.7,7.4 C25.1 | 39.32,5.4 v39.82,5.4 | v41.07,5.4 41.82,4.65 41.82,3.52 TP_3V3.TP | 27.57,23.4 27.07,23.9 27.07,25.02 26.57,25.52 25.45,25.52 CC14.2 25.32,25.52 25.32,25.9 22.82,25.9 TP_SDA5.TP | 27.57,23.4 27.95,23.02 P1.01/2.4B.P$B1 | 24.45,15.65 24.57,15.77 C6.2 24.45,15.65 | 24.45,15.65 23.95,15.15 23.95,12.65 24.2,12.4 CC19.1 | P1.01/2.4B.P$Y2 28.45,18.27 28.45,18.52 28.07,18.52 P1.01/2.4B.P$W1 27.95,18.52 27.57,18.15 v27.57,18.02 | 31.95,16.65 33.07,15.52 33.57,15.52 | 31.95,16.65 31.57,17.02 P1.01/2.4B.P$AD14 | 33.57,15.52 33.7,15.52 C8.1 | P1.01/2.4B.P$AD23 33.95,17.02 33.95,16.77 33.82,16.65 33.82,15.52 C8.1 | 31.95,16.65 v31.7,16.4 | 33.57,15.52 33.57,13.4 34.2,13.4 35.07,12.52 C7.1 | 33.57,15.52 C8.1 | 24.45,15.65 23.57,16.52 v23.57,18.52 | 27.57,23.4 27.7,23.52 v27.7,23.65 | v38.82,24.15 38.82,22.65 v37.82,21.65
  Bottom 0.152: 32.82,9.9 32.07,10.65 v29.07,10.65 v27.82,10.65 | 32.82,9.9 30.2,7.27 28.7,7.27 v26.95,9.02 26.45,9.52 24.82,9.52 23.82,10.52 18.95,10.52 16.7,12.77 12.45,12.77 8.32,16.9 8.32,29.46 10.13,31.26 35.46,31.26 40.85,25.87 40.85,24.77 38.2,24.77 | 32.82,9.9 v32.95,9.77 | v39.82,5.4 v41.07,5.4 44.2,8.52 44.2,19.65 43.45,19.65 43.07,20.02 38.07,20.02 | v23.57,18.52 23.82,18.27 27.32,18.27 v27.57,18.02 28.57,17.02 31.07,17.02 v31.7,16.4 33.07,17.77 33.32,17.77 34.82,19.27 35.45,19.27 35.7,19.02 38.2,19.02 38.2,19.9 38.07,20.02 | v27.7,23.65 29.45,23.65 30.57,24.77 38.2,24.77 | v38.82,24.15 38.2,24.77 | v37.82,21.65 37.82,20.27 38.07,20.02
ALERT  (1 unrouted)
D+  (via drill 0.35)
  Top 0.152: v29.7,16.4 29.7,16.9 29.57,17.02 P1.01/2.4B.P$AD6 | v21.45,19.15 20.45,19.15 20.45,19.77 D4.4
  Bottom 0.152: v29.7,16.4 29.45,16.65 27.95,16.65 26.7,17.9 22.7,17.9 v21.45,19.15
D-  (via drill 0.35)
  Top 0.152: v28.95,15.77 28.95,17.02 P1.01/2.4B.P$AD4 | v19.2,21.15 19.82,21.77 20.32,21.77 D4.6
  Bottom 0.152: v28.95,15.77 28.2,15.02 18.07,15.02 16.45,16.65 16.45,17.52 17.2,17.52 18.45,18.77 18.45,21.15 v19.2,21.15
DN  (via drill 0.35)
  Top 0.152: 22.82,29.4 22.95,29.52 23.57,29.52 23.57,28.65 J3.B7 | 22.82,29.4 22.7,29.27 22.7,28.65 J3.A7 | v17.95,26.4 17.95,21.9 D4.1 | 22.82,29.4 v22.45,29.77
  Bottom 0.152: v17.95,26.4 19.7,28.15 20.82,28.15 v22.45,29.77
DP  (via drill 0.35)
  Top 0.152: 22.32,27.9 22.45,27.77 23.07,27.77 23.07,28.52 J3.A6 | 22.32,27.9 22.2,28.02 22.2,28.52 J3.B6 | v19.07,20.15 19.07,19.9 17.95,19.9 D4.3 | v19.2,22.27 18.32,23.15 18.32,25.27 v19.45,26.4 | 22.32,27.9 v21.82,27.4
  Bottom 0.152: v19.07,20.15 19.82,20.9 19.82,22.27 v19.2,22.27 | v19.45,26.4 20.45,27.4 v21.82,27.4
EPD_3V3  (via drill 0.35)
  Top 0.152: J2.16 11.32,16.27 11.32,16.65 J2.15 11.32,16.77 12.32,16.77 v12.32,18.65 | C1-EP-DR.1 14.7,22.27 14.7,20.77 EPD_C5.2 14.57,20.65 14.57,20.4 v13.7,19.52 | v13.2,10.9 13.2,10.02 13.45,9.77 Q1.3 | v9.82,13.9 9.82,17.65 9.7,17.77 v9.7,18.77 | v16.95,18.15 20.2,18.15 L2.2
  Bottom 0.152: v13.2,10.9 10.2,13.9 v9.82,13.9 | v9.7,18.77 9.82,18.65 v12.32,18.65 13.2,19.52 v13.7,19.52 15.57,19.52 v16.95,18.15
EPD_BUSY  (via drill 0.35)
  Top 0.152: v30.95,15.77 30.95,17.02 P1.01/2.4B.P$AD12 | v40.57,17.4 41.2,18.02 41.2,19.27 40.32,20.15 40.32,25.45 v40.24,25.52 | v9.7,21.77 10.57,20.9 10.57,20.02 10.82,19.77 11.2,19.77 J2.9
  Bottom 0.152: v30.95,15.77 31.95,15.77 32.57,16.4 32.57,16.77 32.7,16.77 33.32,17.4 v40.57,17.4 | v9.7,21.77 9.32,21.77 9.32,23.15 11.82,25.65 20.95,25.65 22.82,27.52 38.24,27.52 v40.24,25.52
EPD_CS  (1 unrouted)
EPD_DC  (via drill 0.35)
  Top 0.152: v30.2,12.4 30.2,12.65 30.7,13.15 30.7,15.02 30.32,15.4 30.32,16.02 30.45,16.15 30.45,17.02 P1.01/2.4B.P$AD10 | v9.57,20.77 10.2,20.15 10.2,19.4 10.82,18.77 11.2,18.77 J2.11
  Bottom 0.152: v30.2,12.4 30.07,12.27 20.2,12.27 18.2,14.27 14.07,14.27 11.32,17.02 9.95,17.02 8.7,18.27 8.7,20.77 v9.57,20.77
EPD_RST  (1 unrouted)
GDR  (via drill 0.35)
  Top 0.152: 10.57,23.52 10.57,25.02 10.82,25.27 R6.2 | 10.57,23.52 10.82,23.27 11.2,23.27 J2.2 | v15.2,6.65 15.2,5.77 15.95,5.02 Q2.1 | v10.45,11.15 8.2,13.4 8.2,22.9 8.82,23.52 10.57,23.52
  Bottom 0.152: v15.2,6.65 10.7,11.15 v10.45,11.15
GND  (via drill 0.35)
  Top 0.152: R10.1 22.07,8.27 22.07,7.65 C4.1 22.2,7.52 24.07,7.52 | SW1.1 24.32,4.9 24.32,6.65 C10.1 24.2,6.77 24.2,7.52 24.07,7.52 | 24.07,7.52 24.07,11.02 24.2,11.15 CC19.2 24.32,11.27 26.32,13.27 | 33.07,11.4 33.07,11.27 IC2.C1 33.2,11.27 33.45,11.27 IC2.C2 33.57,11.27 33.82,11.27 IC2.C3 33.95,11.27 34.45,11.27 34.7,11.02 34.7,10.4 35.2,9.9 IC4.B3 | 33.07,11.4 33.07,11.65 IC2.B1 | 33.07,11.4 31.2,11.4 C23.1 31.07,11.4 28.82,11.4 28.82,11.52 | 25.2,14.65 24.7,14.65 C6.1 | 25.2,14.65 26.32,14.65 C20.1 26.32,14.52 26.32,13.27 | 25.2,14.65 25.2,17.65 25.07,17.77 C18.2 | 35.07,14.02 35.07,13.77 C7.2 35.07,14.02 | 35.07,14.02 35.07,15.27 34.95,15.4 C8.2 | IC3.8 27.82,8.77 27.82,9.15 IC3.9 27.82,9.27 28.45,9.27 28.45,11.52 | 28.82,11.52 28.45,11.52 | 28.45,11.52 26.32,11.52 | 28.82,11.52 28.82,11.65 C24.1 | 29.57,13.65 29.57,12.4 28.95,11.77 C24.1 | 29.57,13.65 29.57,14.15 29.95,14.52 C21.2 | v34.2,14.02 35.07,14.02 | 29.57,13.65 v29.7,13.65 | 26.32,11.52 26.32,13.27 | 26.32,11.52 R8.2 | 28.82,11.52 C24.1 | 38.95,3.52 37.57,4.9 | 37.57,4.9 37.2,5.27 C11.1 37.07,5.27 37.07,4.4 35.95,4.4 35.45,4.9 SW2.1 | 38.95,3.52 38.95,3.27 TP_SDA10.TP 38.95,3.52 | 37.57,4.9 37.57,6.15 35.7,8.02 35.7,8.4 C3.1 | C37.2 41.7,15.65 41.7,18.52 C38.2 41.82,18.65 42.58,19.41 42.58,20.84 CC4.1 | 37.45,9.65 37.45,8.9 37.57,8.77 C25.2 | 37.45,9.65 37.45,9.77 36.32,9.77 IC4.B1 | 37.45,9.65 39.32,7.77 C33.2 39.45,7.77 40.45,7.77 | C2.1 44.2,8.9 42.95,8.9 42.95,9.15 U1.1 42.82,9.27 41.95,9.27 | IC1.D2 37.95,12.65 39.7,12.65 39.7,12.52 R1.1 39.82,12.4 41.57,12.4 41.57,10.77 | 41.57,10.15 41.82,10.15 41.82,10.02 U1.9
  Top 0.152: 41.57,10.15 40.95,10.15 U1.6 | 41.57,10.15 41.57,10.77 | 41.57,10.15 U1.9 | 41.95,9.27 41.95,9.9 U1.9 | 41.57,10.77 42.82,10.77 U1.4 42.95,10.77 42.95,11.52 43.82,12.4 C39.2 43.95,12.52 43.95,14.65 TP_SDA6.TP 43.82,14.77 43.82,15.52 41.7,15.52 C37.2 | 40.45,7.77 41.95,7.77 41.95,9.27 | 38.95,3.52 40.45,5.02 40.45,7.77 | v40.57,14.52 41.57,15.52 C37.2 | 33.2,22.02 33.2,21.77 33.95,21.77 P1.01/2.4B.P$F23 | 29.57,22.15 29.57,22.77 29.82,23.02 P1.01/2.4B.P$B7 | 30.57,18.52 29.57,18.52 P1.01/2.4B.P$87 | 30.57,18.52 P1.01/2.4B.P$88 | 30.57,18.52 P1.01/2.4B.P$74 | 31.95,19.65 31.95,18.52 | 30.57,19.65 29.57,19.65 P1.01/2.4B.P$83 | 30.57,19.65 P1.01/2.4B.P$84 | 30.57,19.65 P1.01/2.4B.P$74 | 31.95,19.65 P1.01/2.4B.P$85 | 31.95,19.65 P1.01/2.4B.P$74 | P1.01/2.4B.P$79 29.57,20.9 30.07,21.4 30.07,21.52 P1.01/2.4B.P$74 | P1.01/2.4B.P$80 30.7,20.9 P1.01/2.4B.P$74 | P1.01/2.4B.P$81 31.95,20.9 P1.01/2.4B.P$74 | 29.57,22.15 P1.01/2.4B.P$75 | 29.57,22.15 P1.01/2.4B.P$74 | P1.01/2.4B.P$76 30.57,22.02 30.2,21.65 30.2,21.52 P1.01/2.4B.P$74 | 31.95,18.52 33.07,18.52 P1.01/2.4B.P$90 | 31.95,18.52 P1.01/2.4B.P$89 | P1.01/2.4B.P$77 31.95,22.02 32.45,21.52 32.45,21.4 P1.01/2.4B.P$74 | 33.07,20.77 33.07,19.77 P1.01/2.4B.P$86 | 33.07,20.77 P1.01/2.4B.P$82 | 33.07,20.77 P1.01/2.4B.P$74 | 33.2,22.02 P1.01/2.4B.P$78 | 33.2,22.02 P1.01/2.4B.P$74 | 38.2,25.4 38.95,25.4 38.95,25.52 CC1.2 | 38.2,25.4 36.95,25.4 | 36.95,25.4 36.95,27.65 X1.4 36.82,27.77 36.2,27.77 36.2,28.27 35.57,28.9 X1.2 35.45,28.9 33.82,28.9 | 36.95,25.4 CC11.2 | 36.82,22.27 37.2,22.65 38.2,22.65 38.2,23.15 CC10.2 38.2,23.27 38.2,25.4 | 36.82,22.27 36.07,21.52 CC3.1 36.07,21.4 36.07,20.9 39.2,20.9 39.32,20.77 39.32,19.52 38.57,18.77 C9.2
  Top 0.152: 25.32,26.9 24.2,26.9 R14.2 | 25.32,26.9 25.32,26.77 CC14.1 25.32,26.9 | 25.32,26.9 27.2,28.77 27.2,29.15 J3.SH3 27.32,29.27 27.32,29.9 | 27.32,29.9 27.32,33.27 J3.SH1 27.2,33.4 18.7,33.4 J3.SH2 18.57,33.27 18.57,29.27 J3.SH4 18.57,29.15 18.7,29.02 18.7,28.02 | C15.2 29.82,26.02 31.7,26.02 C13.2 31.82,26.15 31.82,26.27 33.7,26.27 CC2.2 33.82,26.4 33.82,28.9 | 33.82,28.9 33.07,28.9 33.07,29.15 C12.2 32.95,29.27 31.07,29.27 C16.2 30.95,29.27 30.95,29.9 27.32,29.9 | 36.82,22.27 v36.95,22.15 | SJ1.1 16.82,2.65 15.45,4.02 15.45,4.77 13.7,4.77 SW3.1 13.57,4.9 13.57,6.02 13.32,6.27 C5.1 13.32,6.4 13.82,6.9 13.82,8.15 15.2,9.52 | J2.MP2 8.7,11.27 8.7,11.15 9.82,10.02 EPD_C12.1 9.95,9.9 10.57,9.27 11.95,9.27 11.95,10.52 12.95,11.52 13.82,11.52 13.82,10.9 15.2,9.52 | 16.32,9.27 16.32,10.65 16.2,10.77 EPD_C11.1 16.07,12.77 EPD_C10.1 15.95,12.9 15.95,14.02 15.82,14.15 EPD_C9.1 15.82,15.9 EPD_C8.1 15.95,16.02 15.95,17.9 EPD_C6.1 16.07,18.02 16.07,18.9 | 16.32,9.27 16.32,8.77 D2.1 | 16.07,18.9 16.07,20.17 16.33,20.42 16.33,20.77 17.82,20.77 D4.2 | 15.2,9.52 15.45,9.27 16.32,9.27 | C17.2 24.82,23.9 24.82,23.65 22.82,23.65 CC5.1 22.7,23.65 v21.32,23.65 | 19.7,25.27 19.07,24.65 19.07,24.02 C43.2 | 19.7,25.27 20.07,25.65 C42.1 20.2,25.77 20.2,26.4 R15.1 20.07,26.52 20.07,26.65 18.7,28.02 | 19.7,25.27 v19.95,25.02 | J2.MP1 8.7,24.52 8.7,25.77 10.82,25.77 R6.1 10.95,25.9 11.95,26.9 13.7,26.9 | J2.17 11.32,15.77 12.45,15.77 12.45,16.4 12.95,16.9 EPD_C7.1 13.07,17.02 13.07,18.9 | 13.07,20.27 13.45,20.27 EPD_C5.1 13.45,20.77 13.45,22.27 C1-EP-DR.2 13.45,22.4 13.45,24.15 EPD_C1.1 13.45,24.27 13.45,25.77 13.7,26.02 EPD_C2.1 13.7,26.15 13.7,26.9
  Top 0.152: 13.07,20.27 11.32,20.27 J2.8 | 13.07,20.27 13.07,18.9 | 18.7,28.02 15.04,28.02 15.04,27.92 14.01,26.9 13.7,26.9 | 13.07,18.9 16.07,18.9
  Bottom 0.152: v29.7,13.65 29.82,13.77 33.95,13.77 v34.2,14.02 36.82,14.02 37.32,14.52 v40.57,14.52 | v36.95,22.15 33.2,22.15 P1.01/2.4B.P$78 | v19.95,25.02 v21.32,23.65
  pour Bottom: -0.86,33.64 1.48,35.98 44.07,35.98 47.04,33.01 47.04,3.16 42.92,-0.95 3.54,-0.95 -1.37,3.96 -1.37,23.29
  pour Top: 1.05,36.84 44.3,36.84 47.83,33.31 47.83,2.66 43.4,-1.77 2.93,-1.77 -2.18,3.33 -2.18,33.69 -0.52,35.34 -0.3,35.34
HAPTIC_EN  (via drill 0.35)
  Top 0.152: v24.2,16.77 24.2,18.52 26.2,18.52 26.7,19.02 27.95,19.02 P1.01/2.4B.P$U1 | v23.2,16.02 23.57,15.65 23.57,9.27 v23.45,9.15 | v26.57,6.02 v25.32,7.27 | v38.57,5.65 38.45,5.77 v38.45,6.9 | v36.7,7.9 36.57,8.02 36.57,9.02 36.32,9.27 IC4.A1
  Bottom 0.152: v24.2,16.77 23.45,16.02 v23.2,16.02 | v25.32,7.27 v23.45,9.15 | v26.57,6.02 27.2,5.4 35.82,5.4 36.07,5.65 v38.57,5.65 | v38.45,6.9 37.45,7.9 v36.7,7.9
IMU_INT1  (via drill 0.35)
  Top 0.152: v26.95,20.02 27.95,20.02 P1.01/2.4B.P$N1 | v17.07,16.9 16.7,16.52 v16.7,11.9 | v26.32,7.52 26.7,7.9 26.7,8.15 IC3.5
  Bottom 0.152: v26.95,20.02 26.7,19.77 19.95,19.77 v17.07,16.9 | v16.7,11.9 18.82,9.77 24.07,9.77 v26.32,7.52
IMU_INT2  (1 unrouted)
LX1  (via drill 0.35)
  Top 0.152: IC2.B2 33.57,11.65 33.82,11.65 IC2.B3 33.95,11.65 34.32,11.65 34.32,12.4 v33.95,12.77 | v34.2,8.77 33.7,8.27 33.7,7.15 L1.1
  Bottom 0.152: v33.95,12.77 34.45,12.27 37.45,12.27 37.82,11.9 37.82,8.77 v34.2,8.77
LX2
  Top 0.152: IC2.D2 33.57,10.9 33.82,10.9 IC2.D3 33.95,10.9 34.32,10.9 34.32,9.9 31.57,7.15 L1.2
MOSI  (1 unrouted)
N$1
  Top 0.152: IC1.D1 37.95,12.27 39.32,12.27 39.7,11.9 R1.2
N$2
  Top 0.152: P1.01/2.4B.P$N24 34.57,20.02 35.45,20.02 35.45,19.77 36.45,18.77 37.32,18.77 C9.1
N$3
  Top 0.152: P1.01/2.4B.P$H23 34.07,21.27 34.32,21.52 35.45,21.52 35.45,20.9 35.95,20.4 CC3.2 36.07,20.4 38.7,20.4 LL1.1
N$4
  Top 0.152: IC2.D1 33.07,10.9 31.7,10.9 31.7,10.77 31.2,10.27 30.32,10.27 R2.2
N$5
  Top 0.152: IC2.E1 33.07,10.4 31.82,10.4 30.57,9.15 30.32,9.15 R3.2
N$6
  Top 0.152: P1.01/2.4B.P$AC5 29.2,17.52 28.82,17.52 28.7,17.4 27.7,17.4 27.7,16.4 27.2,15.9 26.45,15.9 C20.2
N$7  (via drill 0.35)
  Top 0.152: v39.57,22.15 38.82,21.4 LL1.2 | CC4.2 40.95,21.07 v40.95,22.15 40.95,23.45 42.21,24.71 ANT1.1
  Bottom 0.152: v39.57,22.15 v40.95,22.15
N$8  (via drill 0.35)
  Top 0.152: v34.95,26.15 34.95,23.4 34.57,23.02 P1.01/2.4B.P$B24 | 38.7,26.77 v38.07,26.15 | 38.7,26.77 38.95,26.77 CC1.1 38.7,26.77 | 38.7,26.77 38.7,28.77 36.95,28.77 X1.1
  Bottom 0.152: v38.07,26.15 v34.95,26.15
N$9
  Top 0.152: P1.01/2.4B.P$A23 33.95,23.52 33.95,24.9 33.82,25.02 CC2.1 33.82,25.15 34.32,25.65 34.32,26.52 35.45,27.65 X1.3
N$10
  Top 0.152: P1.01/2.4B.P$D23 34.07,22.27 34.45,22.65 35.45,22.65 35.45,25.02 35.7,25.27 CC11.1
N$11  (via drill 0.35)
  Top 0.152: 26.7,21.65 27.32,21.65 27.7,22.02 28.2,22.02 28.45,21.77 P1.01/2.4B.P$F2 | 26.7,21.65 26.7,20.77 25.57,19.65 X2.1 | v25.82,16.9 25.82,17.4 26.2,17.77 C18.1 | v18.07,15.9 17.32,15.15 17.32,11.52 17.7,11.15 v19.45,11.15 | v9.07,17.02 8.95,17.15 8.95,21.9 v9.95,22.9 | v26.32,24.9 26.7,24.52 26.7,21.65
  Bottom 0.152: v25.82,16.9 25.32,17.4 19.57,17.4 v18.07,15.9 | v19.45,11.15 17.45,13.15 12.95,13.15 v9.07,17.02 | v9.95,22.9 10.07,23.02 23.32,23.02 25.2,24.9 v26.32,24.9
N$12  (via drill 0.35)
  Top 0.152: v32.82,25.65 32.82,24.9 33.45,24.27 33.45,23.52 P1.01/2.4B.P$A22 | v32.82,26.9 32.95,27.02 32.95,27.9 C12.1
  Bottom 0.152: v32.82,26.9 v32.82,25.65
N$13
  Top 0.152: P1.01/2.4B.P$A18 32.45,23.52 32.45,24.15 31.82,24.77 C13.1
N$14
  Top 0.152: LL2.1 27.82,26.4 28.57,27.15 28.57,28.52 29.2,29.15 LL3.2
N$15
  Top 0.152: P1.01/2.4B.P$B3 28.82,23.02 28.95,23.15 28.95,23.9 29.07,24.02 29.07,24.52 28.45,25.15 LL2.2
N$16  (via drill 0.35)
  other vias: 41,32 38,32 35,32 32,32 29,32 26,32 23,32 20,32 17,32 14,32 11,32 8,32 5,32 44,29 17,29 14,29 11,29 5,29 2,29 44,26 5,26 2,26 44,23 5,5 2,5 41,2 38,2 29,2 8,2 5,2 8,5 26,5 2,8 5,8 8,8 14,17
N$17  (via drill 0.35)
  Top 0.152: 36.45,23.02 36.57,23.15 36.95,23.15 CC10.1 | 36.45,23.02 35.45,22.02 34.57,22.02 P1.01/2.4B.P$E24 | 29.45,24.15 29.45,24.4 29.7,24.65 C15.1 29.7,24.77 29.07,25.4 29.07,27.9 29.2,28.02 LL3.1 29.32,28.02 30.95,28.02 C16.1 | 29.45,24.15 29.45,23.15 29.32,23.02 P1.01/2.4B.P$B5 | v36.07,23.4 36.45,23.02 | 29.45,24.15 v30.82,24.15
  Bottom 0.152: v36.07,23.4 35.32,24.15 v30.82,24.15
N$18  (via drill 0.35)
  Top 0.152: v28.45,24.27 28.45,22.27 P1.01/2.4B.P$D2 | v24.45,25.27 25.2,24.52 25.45,24.52 25.45,24.02 | 25.45,24.02 25.45,22.15 X2.2 | 25.45,24.02 25.95,24.02 C17.1
  Bottom 0.152: v28.45,24.27 27.2,25.52 24.7,25.52 v24.45,25.27
N$19
  Top 0.152: R8.1 25.82,11.4 25.82,10.15 26.2,9.77 IC3.1
N$20  (via drill 0.35)
  Top 0.152: v27.32,22.52 27.95,22.52 P1.01/2.4B.P$C1 | v23.7,22.52 22.82,22.52 22.82,22.4 CC5.2
  Bottom 0.152: v23.7,22.52 v27.32,22.52
N$21
  Top 0.152: 19.82,8.27 19.82,8.65 D2.2 | 19.82,8.27 19.82,7.65 18.7,6.52 C2-EP-DR.1 | 19.82,8.27 21.82,10.27 D1.1
N$22  (via drill 0.35)
  Top 0.152: v22.7,8.52 22.7,8.77 22.32,9.15 R9.2 | v17.7,6.52 17.32,6.15 17.32,5.02 Q2.2
  Bottom 0.152: v22.7,8.52 20.7,6.52 v17.7,6.52
N$23
  Top 0.152: R9.1 21.7,9.15 21.57,9.02 21.57,8.52 21.45,8.4 R10.2 21.32,8.27 20.57,7.52 20.57,4.77 18.45,2.65 SJ1.2
N$24
  Top 0.152: L2.1 20.32,13.52 20.32,13.4 21.7,12.02 D3.2 21.7,11.9 16.7,6.9 | 16.7,6.9 16.7,4.15 17.7,4.15 19.95,6.4 C2-EP-DR.2 | 16.7,6.9 Q2.3
N$25
  Top 0.152: J2.4 11.32,22.27 12.57,22.27 12.57,26.02 EPD_C2.2
N$26  (via drill 0.35)
  Top 0.152: v12.57,21.65 11.32,21.65 J2.5 | v15.57,22.27 15.32,22.52 15.32,23.52 14.7,24.15 EPD_C1.2
  Bottom 0.152: v12.57,21.65 13.2,22.27 v15.57,22.27
N$27
  Top 0.152: R15.2 20.82,26.52 21.07,26.77 21.07,28.52 J3.B5
N$28
  Top 0.152: J2.19 11.32,14.77 12.95,14.77 12.95,15.65 EPD_C7.2
N$29
  Top 0.152: R11.1 11.45,6.4 12.57,6.4 C5.2
N$30
  Top 0.152: EPD_C12.2 11.2,10.02 11.2,12.15 J2.24
N$31  (via drill 0.35)
  Top 0.152: v10.32,18.02 10.32,15.27 11.2,15.27 J2.18 | v13.95,18.02 14.82,18.02 EPD_C6.2
  Bottom 0.152: v13.95,18.02 v10.32,18.02
N$32
  Top 0.152: J2.20 11.32,14.27 13.32,14.27 13.32,14.52 14.7,15.9 EPD_C8.2
N$33
  Top 0.152: R12.1 22.2,6.65 23.57,6.65 C10.2
N$34
  Top 0.152: J2.22 11.32,13.15 14.82,13.15 14.82,12.9 EPD_C10.2
N$35
  Top 0.152: C11.2 37.07,6.02 36.07,6.02 35.82,6.27 35.57,6.27 R13.1
N$36
  Top 0.152: R14.1 23.57,27.02 23.7,27.15 23.7,27.52 24.07,27.9 24.07,28.52 J3.A5
N$37
  Top 0.152: IC4.A2 35.82,9.27 36.07,9.02 36.07,8.52 C3.2
OUT+  (via drill 0.35)
  Top 0.152: v34.82,7.27 34.82,8.9 35.2,9.27 IC4.A3 | v28.82,6.02 27.7,4.9 27.7,4.77 TP_SDA7.TP
  Bottom 0.152: v34.82,7.27 33.57,6.02 v28.82,6.02
OUT-
  Top 0.152: IC4.C3 35.32,10.4 35.32,11.27 35.7,11.65 36.57,11.65 36.57,11.4 36.95,11.02 38.45,11.02 TP_SDA8.TP
P0.13  (1 unrouted)
P0.14  (1 unrouted)
P1.01  (via drill 0.35)
  Top 0.152: v34.45,16.4 34.45,17.15 34.2,17.4 34.2,18.15 34.07,18.27 P1.01/2.4B.P$Y23 | v15.32,16.9 15.32,14.9 15.2,14.77 15.2,13.52 15.45,13.27 v15.45,11.9 | 12.57,8.15 12.57,7.77 Q1.1 | 12.57,8.15 v12.57,10.15 | 12.57,8.15 11.07,8.15 R7.1
  Bottom 0.152: v34.45,16.4 33.07,15.02 28.7,15.02 28.32,14.65 17.57,14.65 v15.32,16.9 | v15.45,11.9 13.7,10.15 v12.57,10.15
P1.02  (1 unrouted)
PMIC_INT  (1 unrouted)
PREVGH  (via drill 0.35)
  Top 0.152: J2.21 11.32,13.77 v13.7,13.77 14.57,13.77 14.57,14.15 EPD_C9.2 | v19.45,12.15 19.45,12.02 18.32,12.02 D3.1
  Bottom 0.152: v19.45,12.15 17.82,13.77 v13.7,13.77
PREVGL  (via drill 0.35)
  Top 0.152: J2.23 11.32,12.65 14.2,12.65 14.2,11.52 14.82,10.9 EPD_C11.2 14.95,10.77 14.95,10.65 v15.7,9.9 | v16.95,10.27 18.32,10.27 D1.2
  Bottom 0.152: v16.95,10.27 16.57,9.9 v15.7,9.9
RESET  (1 unrouted)
SCK  (1 unrouted)
SCL/1.4C
  Top 0.152: IC4.C1 36.32,10.27 37.45,10.27 38.07,9.65 40.82,9.65 U1.7
SCL/2.4C  (via drill 0.35)  (2 unrouted)
  Top 0.152: 28.45,7.4 29.82,8.77 29.82,9.27 | 28.45,7.4 28.2,7.15 28.2,6.27 27.32,6.27 27.07,6.52 27.07,6.65 R4.1 | 29.82,9.27 30.2,9.65 R2.1 | v26.82,10.52 26.82,9.9 IC3.12 | 29.82,9.27 v29.57,9.52 | 28.45,7.4 29.45,6.4 29.45,5.27 29.95,4.77 TP_SCL.TP
  Bottom 0.152: v26.82,10.52 27.32,10.02 29.07,10.02 v29.57,9.52
SDA/1.4C  (1 unrouted)
SDA/2.4C  (via drill 0.35)
  Top 0.152: v27.32,21.02 27.32,20.52 27.95,20.52 P1.01/2.4B.P$L1 | v23.95,21.02 22.82,19.9 TP_SDA.TP | v37.2,11.65 37.45,11.9 37.45,12.27 IC1.C1 | v25.2,10.15 24.57,9.52 24.57,9.27 | 24.57,9.27 24.57,9.15 R5.1 | 24.57,9.27 26.2,9.27 IC3.2 | R3.1 30.2,8.4 29.82,8.02 v29.82,7.9 29.82,6.77 31.2,5.4 31.2,5.15 v31.57,4.77
  Bottom 0.152: v23.95,21.02 v27.32,21.02 29.07,22.77 41.57,22.77 44.45,19.9 44.57,19.77 44.83,19.51 44.83,8.29 42.7,6.15 42.22,5.67 40.95,4.4 31.95,4.4 v31.57,4.77 | v37.2,11.65 26.7,11.65 25.7,10.65 | v25.2,10.15 25.7,10.65 | v29.82,7.9 28.07,9.65 26.82,9.65 25.82,10.65 25.7,10.65
SWDCLK  (via drill 0.35)
  Top 0.152: v35.2,18.65 34.57,18.02 P1.01/2.4B.P$AA24 | v42.7,18.65 43.82,17.52 TP_SDA3.TP
  Bottom 0.152: v35.2,18.65 v42.7,18.65
SWDIO
  Top 0.152: P1.01/2.4B.P$AC24 34.57,17.52 36.07,17.52 36.07,17.02 36.57,16.52 TP_SDA2.TP
SWO  (via drill 0.35)
  Top 0.152: v33.2,16.4 33.45,16.65 33.45,17.02 P1.01/2.4B.P$AD22 | v38.2,16.77 37.95,16.52 37.95,14.52 TP_SDA1.TP
  Bottom 0.152: v33.2,16.4 33.82,17.02 37.95,17.02 v38.2,16.77
VBAT/1.2A
  Top 0.152: 42.95,10.15 43.45,10.15 44.2,9.4 C2.2 44.32,9.27 44.7,9.27 44.7,6.77 43.7,5.77 TP_SDA9.TP | 42.95,10.15 42.95,9.77 U1.2 | 42.95,10.15 U1.3
VBAT/2.5C
  Top 0.152: IC1.C2 37.45,12.77 37.82,13.15 41.45,13.15 41.45,14.27 C37.1
VBUS/1.5D  (2 unrouted)
  Top 0.152: C42.2 20.7,25.65 20.57,25.52 20.57,24.27 20.32,24.02 C43.1 20.32,23.9 20.32,23.77 21.32,22.77 21.32,20.9 20.45,20.9 D4.5
VBUS/2.6D  (via drill 0.35)
  Top 0.152: P1.01/2.4B.P$AD2 28.45,17.02 28.32,16.9 28.32,15.02 28.7,14.65 C21.1 28.7,14.52 v28.07,13.9 | v35.82,14.65 35.82,13.4 36.57,12.65 IC1.A2 | v39.7,18.02 39.7,18.52 40.57,18.52 C38.1
  Bottom 0.152: v28.07,13.9 28.82,14.65 v35.82,14.65 36.32,15.15 41.2,15.15 41.2,17.65 40.82,18.02 v39.7,18.02
VREG  (via drill 0.35)
  Top 0.152: IC2.A3 33.82,12.02 33.57,12.02 IC2.A2 33.45,12.02 33.2,12.02 IC2.A1 33.07,12.15 32.95,12.15 | 32.95,12.15 31.2,12.15 31.2,12.4 C23.2 | v36.7,13.4 36.7,13.15 37.07,12.77 IC1.B2 | v39.32,13.9 39.57,14.15 39.57,16.02 TP_VREG.TP | v42.07,13.27 42.07,13.02 42.57,12.52 C39.1 | v27.95,12.9 28.82,12.9 C24.2 | v32.95,13.02 32.95,12.15
  Bottom 0.152: v42.07,13.27 41.45,13.9 v39.32,13.9 37.2,13.9 v36.7,13.4 33.7,13.4 33.32,13.02 v32.95,13.02 28.07,13.02 v27.95,12.9